# Altium PCB PCB.PcbDoc
Units mil, origin at the board's own origin, x right, y up, seen from the top; angles counter-clockwise.
Board outline 2130 x 1470 mil, 2 copper layers (Top Layer, Bottom Layer); 74 components, 54 nets, 192 pads, 448 vias.
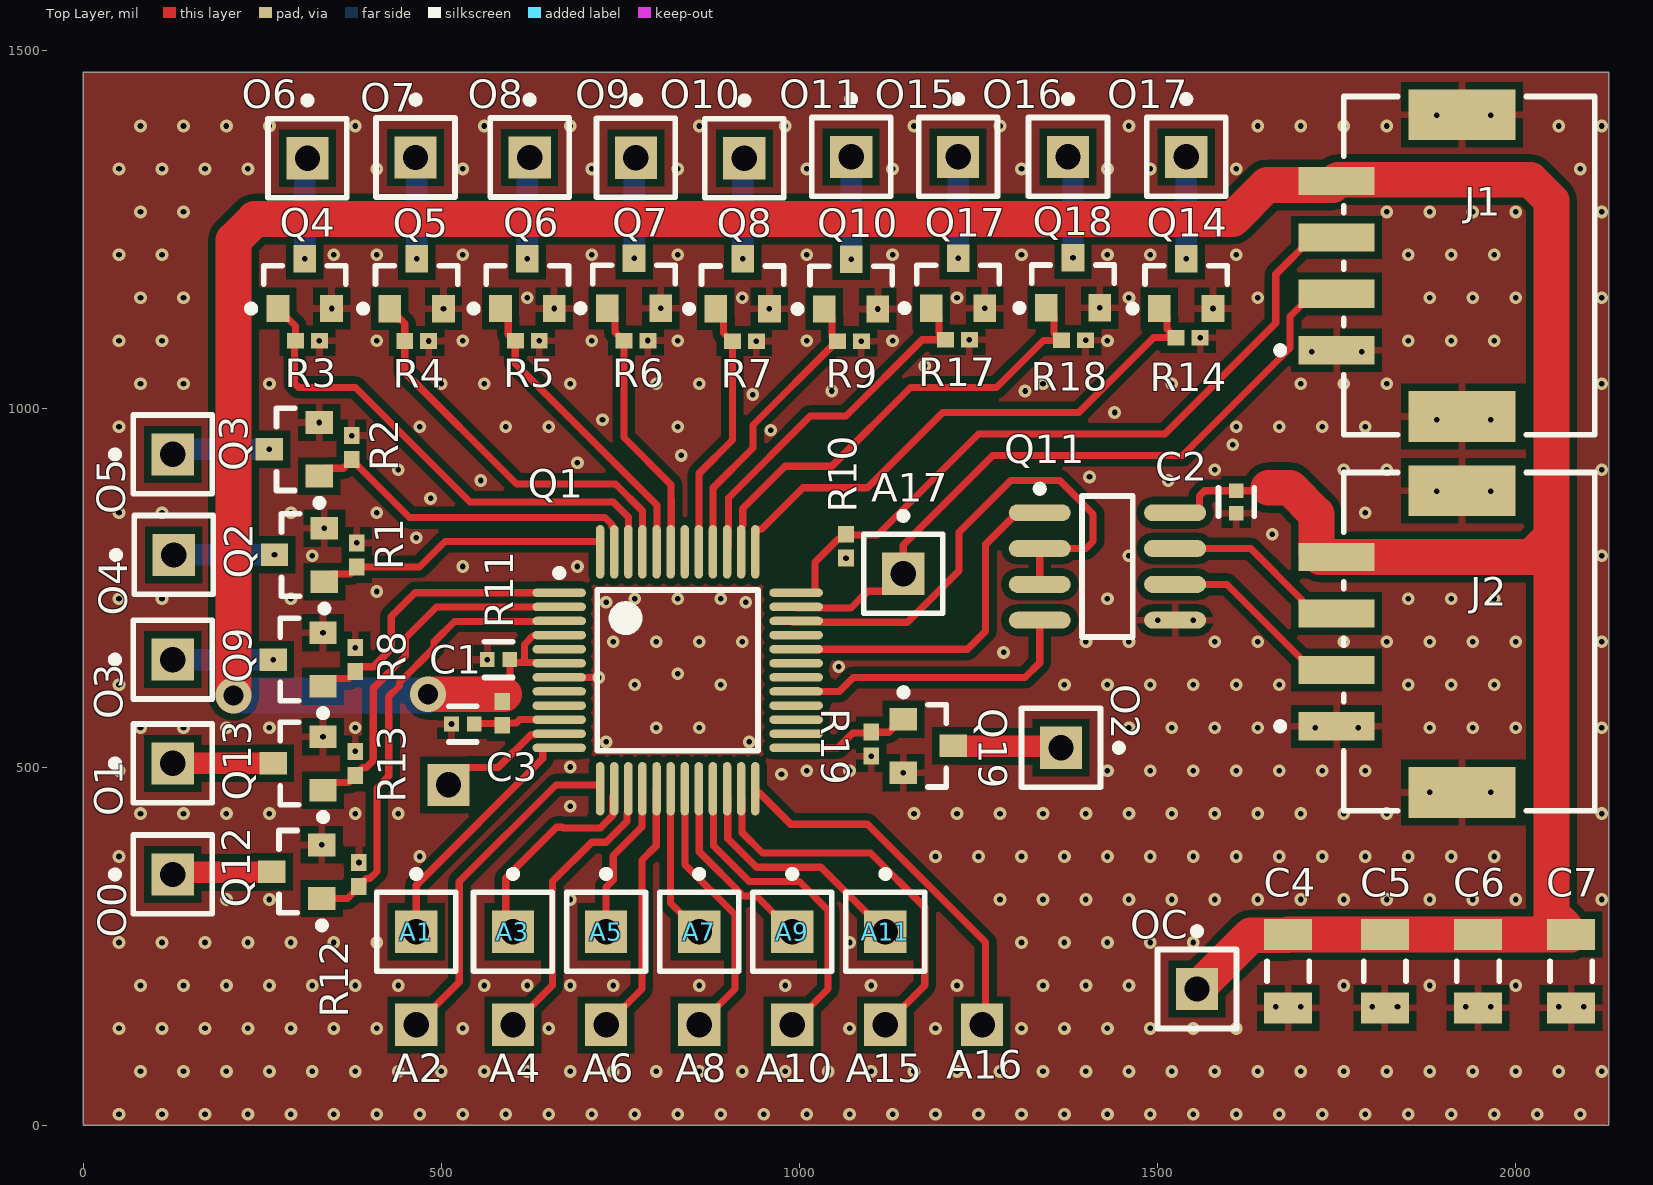
[diagram p0: Top Layer view]
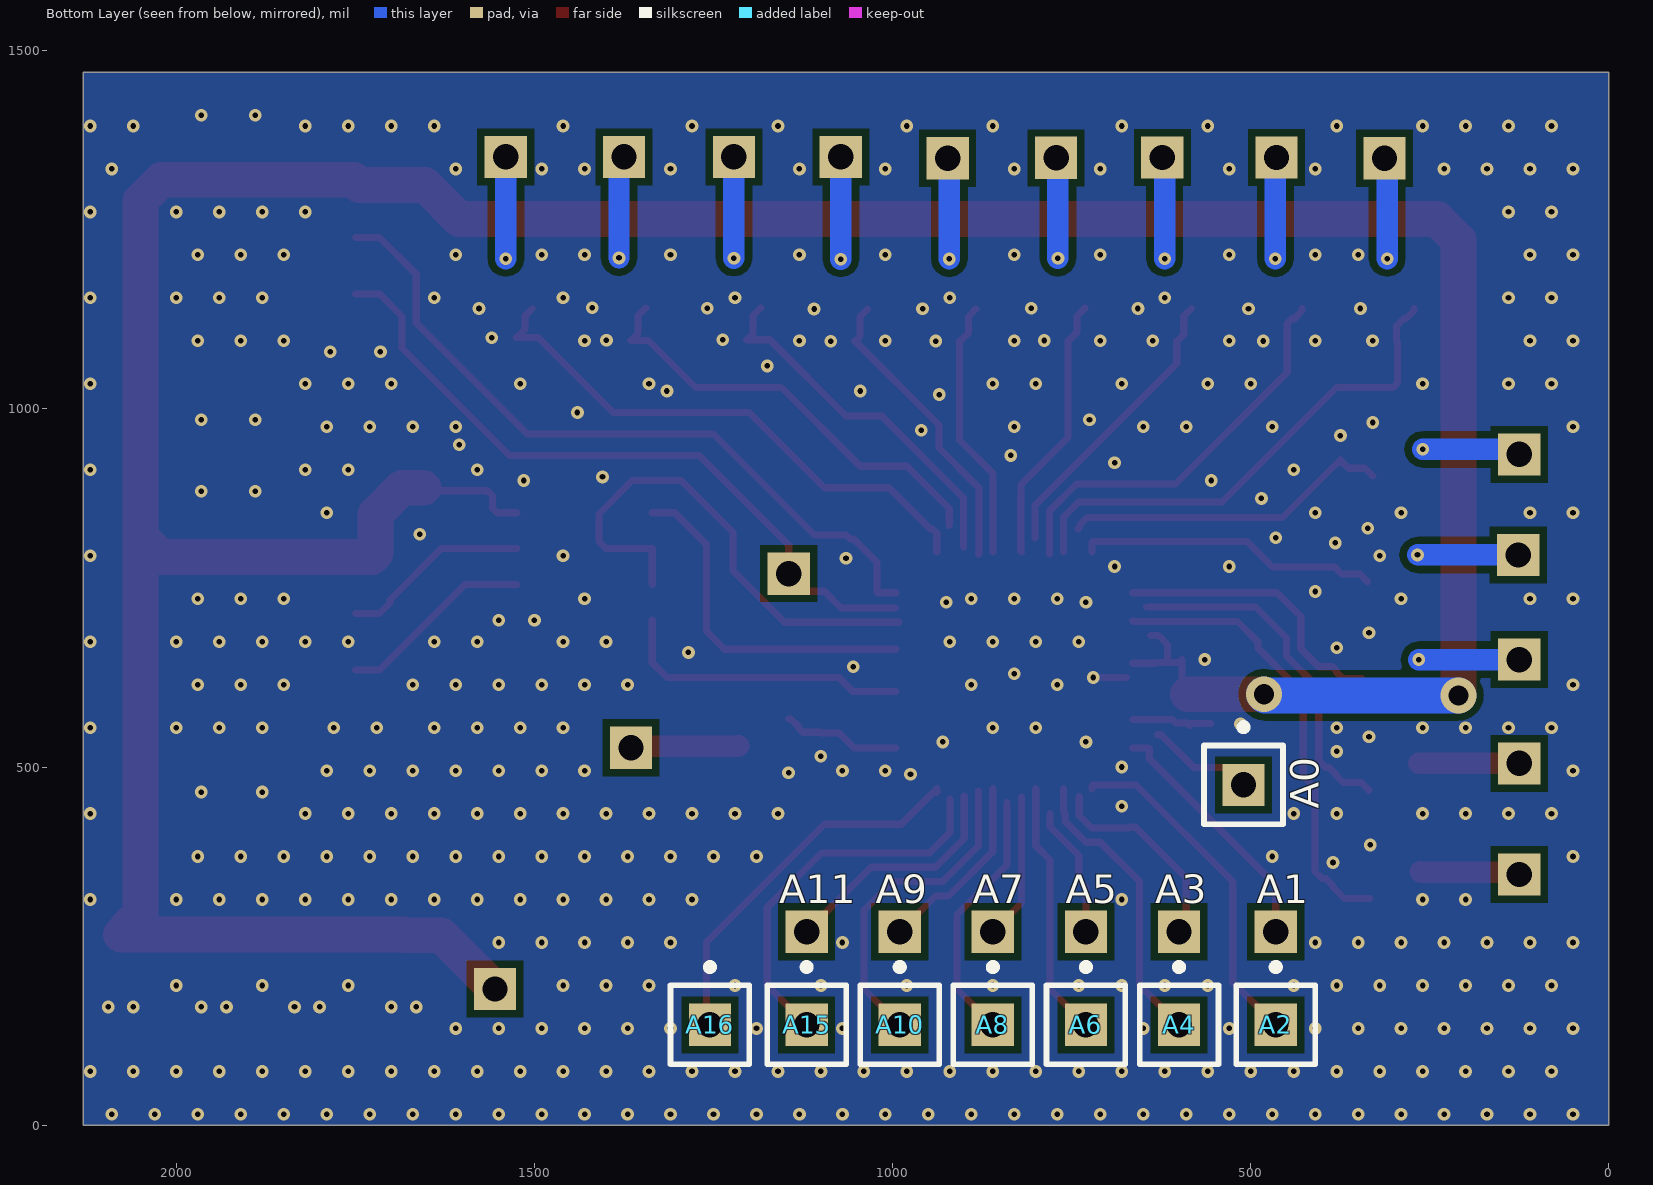
[diagram p1: Bottom Layer view, seen from below]

## Layer stack, top to bottom
Top Solder: solder mask 0.4, Solder Resist, Dk 3.5
Top Layer: signal copper 1.4
Dielectric 1: dielectric 12.6, FR-4, Dk 4.8
Bottom Layer: signal copper 1.4
Bottom Solder: solder mask 0.4, Solder Resist, Dk 3.5

## Board outline
0,0 2130,0 2130,1470 0,1470

## Design rules (kind name [scope] priority, off if disabled: settings)
AssemblyTestPointUsage [All] p1: allowmultiple=TRUE
AssemblyTestpoint [All] p1: testpointundercomponent=TRUE minsize=25 maxsize=100 preferedsize=25 minholesize=0 maxholesize=40 preferedholesize=10 testpointgrid=1 usegrid=TRUE gridtolerance=0.01 allowsidetop=TRUE allowsidebottom=TRUE
Clearance [All] p1: gap=10 ignorepadtopadclearanceinfootprint=FALSE except(0: Arc-Hole Track-Hole SMDPad-Hole THPad-Hole Via-Hole Fill-Hole Poly-Hole Region-Hole Text-Hole; 5.5: Arc-SMDPad Arc-THPad Arc-Via Arc-Text Track-SMDPad Track-THPad Track-Via Track-Text SMDPad-SMDPad SMDPad-THPad SMDPad-Via SMDPad-Text THPad-THPad THPad-Via THPad-Text Via-Via Via-Text Fill-Text Poly-Text Region-Text Text-Text; 9: Arc-Arc Arc-Track Track-Track)
FabricationTestPointUsage [All] p1: valid=0 allowmultiple=TRUE
FabricationTestpoint [All] p1: side=3 testpointundercomponent=TRUE minsize=25 maxsize=100 preferedsize=25 minholesize=7.7 maxholesize=40 preferedholesize=10 testpointgrid=1 allowsidetop=TRUE allowsidebottom=TRUE usegrid=TRUE gridtolerance=0.01
HoleSize [All] p1: absolutevalues=TRUE maxlimit=600 minlimit=7.7 maxpercent=80.000 minpercent=20.000
MinimumSolderMaskSliver [All] p1: minsoldermaskwidth=3.5
PlaneConnect PlaneConnect_via [IsVia] p1: planeconnectstyle=Direct reliefexpansion=20 reliefentries=4 reliefconductorwidth=10 reliefairgap=10
PlaneConnect [All] p2: planeconnectstyle=Relief reliefexpansion=20 reliefentries=4 reliefconductorwidth=10 reliefairgap=10
PolygonConnect PolygonConnect_via [IsVia] p1: connectstyle=Direct reliefconductorwidth=10 reliefentries=4 polygonreliefangle="90 Angle" airgapwidth=10
PolygonConnect [All] p2: connectstyle=Relief reliefconductorwidth=10 reliefentries=4 polygonreliefangle="90 Angle" airgapwidth=10
RoutingVias [All] p1: holewidth=28 width=50 viastyle="Through Hole" minholewidth=28 minwidth=50 maxholewidth=28 maxwidth=50
SilkToSilkClearance [All] p1: silktosilkclearance=1
SilkToSolderMaskClearance [IsPad] p1: minsilkscreentomaskgap=0 clearancetoexposedcopper=FALSE
SolderMaskExpansion SolderMaskExpansion_Via [IsVia] p1: expansion=2 istentingtop=TRUE
SolderMaskExpansion [All] p2: expansion=2 istentingtop=FALSE
UnRoutedNet [All] p1: checkbadconnections=TRUE
Width Width_power [InNet('VCC')] p1: maxlimit=50 minlimit=10 preferedwidth=10
Width [All] p2: maxlimit=30 minlimit=10 preferedwidth=30
20 further rules are at their usual default settings.

## Components (designator, comment, footprint, x,y, rotation, side; value= is the part's Value field where it differs from the comment)
A0 "Socket" PIN1 510,475 r180 bottom
A1 "Socket" PIN1 465,270 r0 top
A2 "Socket" PIN1 465,140 r180 bottom
A3 "Socket" PIN1 600,270 r0 top
A4 "Socket" PIN1 600,140 r180 bottom
A5 "Socket" PIN1 730,270 r0 top
A6 "Socket" PIN1 730,140 r180 bottom
A7 "Socket" PIN1 860,270 r0 top
A8 "Socket" PIN1 860,140 r180 bottom
A9 "Socket" PIN1 990,270 r0 top
A10 "Socket" PIN1 990,140 r180 bottom
A11 "Socket" PIN1 1120,270 r0 top
A15 "Socket" PIN1 1120,140 r180 bottom
A16 "Socket" PIN1 1255,140 r180 bottom
A17 "Socket" PIN1 1145,770 r0 top
C1 "C0402C104K8PACTU 100nF" FP-C0402-BB-MFG 580,650 r180 top value="0.10 μF"
C2 "C0402C104K8PACTU 100nF" FP-C0402-BB-MFG 1610,870 r270 top value="0.10 μF"
C3 "C0402C104K8PACTU 10nF" FP-C0402-BB-MFG 530,560 r180 top value="0.10 μF"
C4 "1206GC102KAT1A 10uF" AVX-1206-2_L 1682.4,214.84 r90 top
C5 "1206GC102KAT1A 10uF" AVX-1206-2_L 1817.4,214.84 r90 top
C6 "1206GC102KAT1A 10uF" AVX-1206-2_L 1947.4,214.84 r90 top
C7 "1206GC102KAT1A 10uF" AVX-1206-2_L 2077.4,214.84 r90 top
J1 "SM04B-PASS-TBT(LF)(SN)" FP-SM04B-PASS-TBT_LF_SN-MFG 1935,1200 r270 top
J2 "SM04B-PASS-TBT(LF)(SN)" FP-SM04B-PASS-TBT_LF_SN-MFG 1935,675 r270 top
O0 "Socket" PIN1 125,350 r90 top
O1 "Socket" PIN1 125,505 r90 top
O2 "Socket" PIN1 1365.16,526.91 r270 top
O3 "Socket" PIN1 125,650 r90 top
O4 "Socket" PIN1 126.42,796.09 r90 top
O5 "Socket" PIN1 125.05,936.42 r90 top
O6 "Socket" PIN1 313.08,1350 r0 top
O7 "Socket" PIN1 463.99,1350.96 r0 top
O8 "Socket" PIN1 623.35,1350.96 r0 top
O9 "Socket" PIN1 771.67,1350.48 r0 top
O10 "Socket" PIN1 923.13,1350 r0 top
O11 "Socket" PIN1 1072.16,1351.8 r0 top
O15 "Socket" PIN1 1221.46,1351.8 r0 top
O16 "Socket" PIN1 1375,1351.8 r0 top
O17 "Socket" PIN1 1540,1351.8 r0 top
OC "Socket" PIN1 1555,190 r0 top
Q1 "STM32G030C8T6" LQFP-48 830,635 r0 top
Q2 "IRLML2502TRPBF" INTR-SOT-23-3_V 301.89,796.09 r90 top
Q3 "IRLML2502TRPBF" INTR-SOT-23-3_V 294.81,943.63 r90 top
Q4 "IRLML2502TRPBF" INTR-SOT-23-3_V 309.33,1175 r0 top
Q5 "IRLML2502TRPBF" INTR-SOT-23-3_V 465.65,1174.79 r0 top
Q6 "IRLML2502TRPBF" INTR-SOT-23-3_V 620,1175 r0 top
Q7 "IRLML2502TRPBF" INTR-SOT-23-3_V 769.08,1175.32 r0 top
Q8 "IRLML2502TRPBF" INTR-SOT-23-3_V 920.73,1174.55 r0 top
Q9 "IRLML2502TRPBF" INTR-SOT-23-3_V 300,650 r90 top
Q10 "IRLML2502TRPBF" INTR-SOT-23-3_V 1072.16,1174.3 r0 top
Q11 "ST1480ABDR" 8S1_N 1430,780 r0 top
Q12 "IRLML2502TRPBF" INTR-SOT-23-3_V 298.37,353.79 r90 top
Q13 "IRLML2502TRPBF" INTR-SOT-23-3_V 300,505 r90 top
Q14 "IRLML2502TRPBF" INTR-SOT-23-3_V 1540,1175 r0 top
Q17 "IRLML2502TRPBF" INTR-SOT-23-3_V 1221.46,1175.57 r0 top
Q18 "IRLML2502TRPBF" INTR-SOT-23-3_V 1381.94,1175.91 r0 top
Q19 "IRLML2502TRPBF" INTR-SOT-23-3_V 1180,529.51 r270 top
R1 "RC0402JR-070RL 4.7k" RESC1005X40X25NL05T10 381.89,796.09 r270 top
R2 "RC0402JR-070RL 4.7k" RESC1005X40X25NL05T10 374.66,946.04 r270 top
R3 "RC0402JR-070RL 4.7k" RESC1005X40X25NL05T10 313.08,1095 r180 top
R4 "RC0402JR-070RL 4.7k" RESC1005X40X25NL05T10 465.65,1094.79 r180 top
R5 "RC0402JR-070RL 4.7k" RESC1005X40X25NL05T10 620,1095 r180 top
R6 "RC0402JR-070RL 4.7k" RESC1005X40X25NL05T10 771.67,1095.48 r180 top
R7 "RC0402JR-070RL 4.7k" RESC1005X40X25NL05T10 923.13,1094.7 r180 top
R8 "RC0402JR-070RL 4.7k" RESC1005X40X25NL05T10 380,650 r270 top
R9 "RC0402JR-070RL 4.7k" RESC1005X40X25NL05T10 1069.76,1094.46 r180 top
R10 "RC0402JR-070RL 1k" RESC1005X40X25NL05T10 1065,808.27 r270 top
R11 "RC0402JR-070RL 100" RESC1005X40X25NL05T10 585,575 r90 top
R12 "RC0402JR-070RL 4.7k" RESC1005X40X25NL05T10 385,350 r270 top
R13 "RC0402JR-070RL 4.7k" RESC1005X40X25NL05T10 380,505 r270 top
R14 "RC0402JR-070RL 4.7k" RESC1005X40X25NL05T10 1542.69,1099.44 r180 top
R17 "RC0402JR-070RL 4.7k" RESC1005X40X25NL05T10 1220.53,1096.43 r180 top
R18 "RC0402JR-070RL 4.7k" RESC1005X40X25NL05T10 1382.75,1095.62 r180 top
R19 "RC0402JR-070RL 4.7k" RESC1005X40X25NL05T10 1100.16,531.91 r90 top

## Footprints (in the part's own frame and the unit in brackets; to place one, negate y for a bottom-side part, rotate by r counter-clockwise, add the part's x,y. Pads: shape width x height; smd on the part's side, far side on the other; paste and mask are expansions set on the pad)
8S1_N [mm] "8-Pin Small Outline Integrated Circuit 1.27 mm Pitch, IPC Medium Density"
  oval 2.2x0.6 smd: 1(-2.4,1.905) 2(-2.4,0.635) 3(-2.4,-0.635) 4(-2.4,-1.905) 5(2.4,-1.905) 6(2.4,-0.635) 7(2.4,0.635) 8(2.4,1.905)
  silkscreen extent -2.52,-2.5 0.9,2.88, body extent -1.95,-2.45 1.95,2.45, height 1.73
AVX-1206-2_L [mm] "SMD, 2-Leads, Body 3.4x1.8mm, IPC High Density"
  rect 1.1x1.7 smd: 1(-1.3,0) 2(1.3,0)
  silkscreen extent -0.35,-0.75 0.35,0.75, body extent -1.7,-0.9 1.7,0.9, height 1.52
FP-C0402-BB-MFG [mm]
  rect 0.52x0.52 smd paste+0 mask+0: 1(-0.4,0) 2(0.4,0)
  silkscreen extent -0.5,-0.64 0.5,0.64, body extent -0.8,-0.4 0.8,0.4, height 0.25
FP-SM04B-PASS-TBT_LF_SN-MFG [mm]
  rect 1x2.7 smd paste+0 mask+0: 1(3,-4.7) 2(1,-4.7) 3(-1,-4.7) 4(-3,-4.7)
  rect 1.8x3.8 smd paste+0 mask+0: 5(-5.35,-0.25) 6(5.35,-0.25)
  silkscreen extent -6,-6.82 6,4.45, body extent -6.01,-5.48 5.99,4.52, height 5.8
INTR-SOT-23-3_V [mm] "SOT23, 3-Leads, Body 2.92x1.3mm, Pitch 1.9mm"
  rect 0.802x0.972 smd: 1(-0.95,-0.885) 2(0.95,-0.885) 3(0,0.885)
  silkscreen extent -2.03,-1.01 1.46,0.64, body extent -1.46,-0.65 1.46,0.65, height 1.12
LQFP-48 [mm] "TSQFP, 48-Leads, Body 9,0x9,0mm (max), Pitch 0,50mm, IPC Medium Density"
  oval 1.9x0.3 smd: 1(-4.2,2.75) 2(-4.2,2.25) 3(-4.2,1.75) 4(-4.2,1.25) 5(-4.2,0.75) 6(-4.2,0.25) 7(-4.2,-0.25) 8(-4.2,-0.75) 9(-4.2,-1.25) 10(-4.2,-1.75) 11(-4.2,-2.25) 12(-4.2,-2.75) 25(4.2,-2.75) 26(4.2,-2.25) 27(4.2,-1.75) 28(4.2,-1.25) 29(4.2,-0.75) 30(4.2,-0.25) 31(4.2,0.25) 32(4.2,0.75) 33(4.2,1.25) 34(4.2,1.75) 35(4.2,2.25) 36(4.2,2.75)
  oval 0.3x1.9 smd: 13(-2.75,-4.2) 14(-2.25,-4.2) 15(-1.75,-4.2) 16(-1.25,-4.2) 17(-0.75,-4.2) 18(-0.25,-4.2) 19(0.25,-4.2) 20(0.75,-4.2) 21(1.25,-4.2) 22(1.75,-4.2) 23(2.25,-4.2) 24(2.75,-4.2) 37(2.75,4.2) 38(2.25,4.2) 39(1.75,4.2) 40(1.25,4.2) 41(0.75,4.2) 42(0.25,4.2) 43(-0.25,4.2) 44(-0.75,4.2) 45(-1.25,4.2) 46(-1.75,4.2) 47(-2.25,4.2) 48(-2.75,4.2)
  silkscreen extent -4.32,-2.85 2.85,3.57, body extent -4.5,-4.5 4.5,4.5, height 1.5
PIN1 [mm] "Connector; Plug"
  rect 1.5x1.5 hole 0.9: 1(0,0)
  silkscreen extent -1.4,-1.4 1.4,2.17
RESC1005X40X25NL05T10 [mm] "Chip Resistor, 2-Leads, Body 1.00x0.50mm, IPC Medium Density"
  rect 0.6x0.55 smd: 1(-0.425,0) 2(0.425,0)
  body extent -0.53,-0.27 0.53,0.28, height 0.4

## Part data
C1 C2 C3: library part CMP-2008-02046-2, "CAP CER 0.1UF 10V X5R 0402", Capacitance="0.10 μF", Manufacturer=Kemet, Manufacturer Part Number=C0402C104K8PACTU, Package=C0402-BB, Temperature="-55°C to +125°C", Temperature Characteristic=X5R, Temperature Coefficient=15%, Temperature Range High=+125°C, Temperature Range Low=-55°C, Tolerance=0.1, Voltage Rating="10 V", Automotive=No, Category=Cap, ComponentLink2Description=Datasheet, ComponentLink2URL=https://content.kemet.com/datasheets/KEM_C1002_X7R_SMD.pdf, Device Class L1="Passive Components", Device Class L2=Capacitors, Device Class L3="Ceramic Capacitors", Digikey Description="CAP CER 0.1UF 10V X5R 0402", Height=0.55mm, Ipc Land Pattern Name=CAPC10050X50, Lead Free=Yes, Material=Ceramic, Mouser Description="Capacitor 100 nF 10 VDC 0402", Octopart=https://octopart.com/c0402c104k8pactu-kemet-140039, RoHS=TRUE
C4 C5 C6 C7: library part CMP-2000-05468-1, "Chip Capacitor, 1 nF, +/- 10%, -55 to 125 degC, 1206 (3216 Metric), RoHS, Tape and Reel", Capacitance=0.001uF, Case Size/Dimension=1206, Dielectric=X7R, Manufacturer=AVX, Package Description="2-Pin SMD, Body 3.4 x 1.8 mm", PartNumber=1206GC102KAT1A, Rated Voltage=2000V, Tolerance=10%, Tolerance (%)=±10%, Datasheet URL=https://datasheet.ciiva.com/11787/0900766b80ed4c37-11787781.pdf, Datasheet Version=11/2010, Manufacturer URL=http://www.avx.com/, Mounting Technology=SurfaceMount, Package Reference=1206, Voltage Rating DC=2000V
J1 J2: library part CMP-2000-07078-2, "CONN HEADER SMD R/A 4POS 2MM", Current Rating=3A, Manufacturer=JST, Temperature="-25°C to +85°C", Temperature Range High=+85°C, Temperature Range Low=-25°C, Voltage Rating=250V, Automotive=No, Category=Conn, ComponentLink2Description=Datasheet, ComponentLink2URL=http://www.jst-mfg.com/product/pdf/eng/ePA-F.pdf, Conn Gender=Male, Conn Orientation="Right Angle", Contact Material=Tin, Device Class L1=Connectors, Device Class L2="Headers and Wire Housings", Device Class L3=unset, Digikey Description="CONN HEADER SMD R/A 4POS 2MM", Height=5.7mm, Lead Free=Yes, Manufacturer Part Number=SM04B-PASS-TBT(LF)(SN), Number Of Contacts=4, Number Of Rows=1, Octopart=https://octopart.com/sm04b-pass-tbt%28lf%29%28sn%29-jst-3990422, Package=SM04B-PASS-TBT(LF)(SN), Pitch=2mm, RoHS=TRUE
Q2 Q3 Q4 Q5 Q6 Q7 Q8 Q9 Q10 Q12 Q13 Q14 Q17 Q18 Q19: library part CMP-2000-04985-1, "N-Channel HEXFET(R) Power MOSFET, 20 V VDS, +/- 12 V VGS, 4.2 A, 3-Pin SOT23, RoHS, Tape and Reel", Drain-Source On Resistance-Max=0.045O, Drain-to-Source Voltage [Vdss]=20V, Manufacturer="International Rectifier", Package Description="3-Pin Small Outline Transistor, Body 2.92 x 1.3 mm, Pitch 0.95 mm", Package Reference=SOT-23-3, Rated Power Dissipation=1.25W, Channel Type=N-Channel, Datasheet URL=https://datasheet.ciiva.com/6383/irlml2502pbf-6383216.pdf, Datasheet Version=Apr-14, Manufacturer URL=http://internationalrectifier.com/, Qg Gate Charge=8nC
R1 R2 R3 R4 R5 R6 R7 R8 R9 R10 R11 R12 R13 R14 R17 R18 R19: library part CMP-1011-00001-2, Manufacturer="Yageo / Phycomp", Part Number=RC0402JR-070RL
A0 A1 A2 A3 A4 A5 A6 A7 A8 A9 A10 A11 A15 A16 A17 O0 O1 O2 O3 O4 O5 O6 O7 O8 O9 O10 O11 O15 O16 O17 OC: LatestRevisionDate=17-Jul-2002, LatestRevisionNote="Re-released for DXP Platform.", Publisher="Altium Limited"

## Via types
v1: diameter 17.7, hole 7.8, Top Layer to Bottom Layer, tented both sides, 446 vias
v2: diameter 50, hole 28, Top Layer to Bottom Layer, tented both sides, 2 vias

## Nets (pads, with @x,y where several pads share a name; then routed paths per layer and width w, separated by ;. In a path a pad name is that pad's centre, name@x,y a point inside that pad or via, vN(x,y) a via of type N, cw(c..) or ccw(c..) an arc to the next point about the centre after c; other vN are vias at no path point)
GND: C1.2 C2.2 C3.2 C4.1 C5.1 C6.1 C7.1 J1.1 J1.5 J1.6 J2.1 J2.5 J2.6 Q1.7 Q2.2 Q3.2 Q4.2 Q5.2 Q6.2 Q7.2 Q8.2 Q9.2 Q10.2 Q11.5 Q12.2 Q13.2 Q14.2 Q17.2 Q18.2 Q19.2 R1.1 R2.1 R3.1 R4.1 R5.1 R6.1 R7.1 R8.1 R9.1 R10.2 R12.1 R13.1 R14.1 R17.1 R18.1 R19.1 | length 50.4
  Top Layer w10: Q1.7@673.28,625.19 673.39,625.08 723.45,625.08 v1@723.56,625.19
  other v1: 50,15 110,15 170,15 230,15 290,15 350,15 410,15 470,15 530,15 590,15 650,15 710,15 770,15 830,15 890,15 950,15 1010,15 1070,15 1130,15 1190,15 1250,15 1310,15 1370,15 1430,15 1490,15 1550,15 1610,15 1670,15 1730,15 1790,15 1850,15 1910,15 1970,15 2030,15 2090,15 80,75 140,75 200,75 260,75 320,75 380,75 440,75 500,75 560,75 620,75 680,75 740,75 800,75 860,75 920,75 980,75 1040,75 1100,75 1160,75 1220,75 1280,75 1340,75 1400,75 1460,75 1520,75 1580,75 1640,75 1700,75 1760,75 1820,75 1880,75 1940,75 2000,75 2060,75 2120,75 50,135 110,135 170,135 230,135 290,135 350,135 410,135 530,135 650,135 1070,135 1190,135 1310,135 1370,135 1430,135 1490,135 1550,135 1610,135 1665,165 1700,165 1800,165 1835,165 1930,165 1965,165 2060,165 2095,165 80,195 140,195 200,195 260,195 320,195 380,195 440,195 560,195 620,195 680,195 740,195 860,195 980,195 1100,195 1220,195 1340,195 1400,195 1460,195 1760,195 1880,195 2000,195 50,255 110,255 170,255 230,255 290,255 350,255 410,255 1070,255 1310,255 1370,255 1430,255 1490,255 1550,255 200,315 260,315 680,315 1280,315 1340,315 1400,315 1460,315 1520,315 1580,315 1640,315 1700,315 1760,315 1820,315 1880,315 1940,315 2000,315 2120,315 385,366.73 50,375 470,375 1190,375 1250,375 1310,375 1370,375 1430,375 1490,375 1550,375 1610,375 1670,375 1730,375 1790,375 1850,375 1910,375 1970,375 333.21,391.19 80,435 140,435 200,435 260,435 380,435 440,435 1160,435 1220,435 1280,435 1340,435 1400,435 1460,435 1520,435 1580,435 1640,435 1700,435 1760,435 1820,435 2120,435 680,445 1880,465 1965,465 975,490 1145.16,492.11 50,495 1010,495 1070,495 1430,495 1490,495 1550,495 1610,495 1670,495 1730,495 1790,495 680,500 1100.16,515.18 380,521.73 730,535 930,535 334.84,542.4 80,555 140,555 200,555 260,555 380,555 800,555 860,555 1460,555 1520,555 1580,555 1640,555 1720,555 1780,555 1880,555 1940,555 2000,555 2120,555 514.25,560 50,615 770,615 890,615 1370,615 1430,615 1490,615 1550,615 1610,615 1670,615 1850,615 1910,615 1970,615 720,625 830,630 1055,640 564.25,650 1285,660 380,666.73 740,675 800,675 860,675 920,675 1400,675 1460,675 1580,675 1640,675 1760,675 1820,675 1880,675 1940,675 2000,675 2120,675 334.84,687.4 1500,705 1550,705 730,730 925,730 50,735 110,735 290,735 770,735 830,735 890,735 1430,735 1850,735 1910,735 1970,735 410,745 530,780 690,780 1065,791.54 320,795 1460,795 2120,795 381.89,812.82 465,820 1660,825 336.73,833.49 50,855 110,855 290,855 410,855 1790,855 485,875 1890,885 1965,885 555,900 1515,900 1405,905 440,915 1580,915 1760,915 1820,915 2120,915 690,925 835,935 1605,950 374.66,962.77 960,970 50,975 470,975 590,975 650,975 830,975 1610,975 1670,975 1730,975 1790,975 329.66,981.04 725,985 1890,985 1965,985 1440,995 935,1020 1045,1025 1315,1025 80,1035 140,1035 260,1035 500,1035 560,1035 680,1035 800,1035 860,1035 1340,1035 1520,1035 1700,1035 1760,1035 1820,1035 2120,1035 1175,1060 1715,1080 1785,1080 1086.5,1094.46 50,1095 110,1095 329.81,1095 410,1095 482.38,1094.79 530,1095 636.73,1095 710,1095 788.41,1095.48 830,1095 939.86,1094.7 1010,1095 1130,1095 1430,1095 1850,1095 1910,1095 1970,1095 1237.26,1096.43 1399.49,1095.62 1559.42,1099.44 1109.57,1139.46 346.73,1140.16 503.05,1139.95 657.4,1140.16 806.48,1140.48 958.13,1139.7 1577.4,1140.16 1258.86,1140.72 1419.34,1141.07 80,1155 140,1155 620,1155 920,1155 1220,1155 1460,1155 1640,1155 1880,1155 1940,1155 2000,1155 2120,1155 50,1215 110,1215 350,1215 410,1215 530,1215 710,1215 830,1215 1010,1215 1130,1215 1310,1215 1430,1215 1490,1215 1610,1215 1850,1215 1910,1215 1970,1215 80,1275 140,1275 1820,1275 1880,1275 1940,1275 2000,1275 2120,1275 50,1335 110,1335 170,1335 230,1335 410,1335 530,1335 710,1335 830,1335 1010,1335 1130,1335 1310,1335 1430,1335 1490,1335 1610,1335 2090,1335 80,1395 140,1395 200,1395 260,1395 380,1395 560,1395 680,1395 860,1395 980,1395 1160,1395 1280,1395 1460,1395 1640,1395 1700,1395 1760,1395 1820,1395 2060,1395 2120,1395 1890,1410 1965,1410
NetA0_1: A0.1 Q1.11 | length 149
  Top Layer w10: A0.1 534.53,499.53 579.53,499.53 625,545 Q1.11@630,545
NetA1_1: A1.1 Q1.12 | length 352.4
  Top Layer w10: A1.1 465,335 641.68,511.68 641.68,525.9 642.52,526.73 Q1.12
NetA2_1: A2.1 Q1.13 | length 482.4
  Top Layer w10: A2.1 525,200 525,340 660,475 720.9,475 721.73,474.16 Q1.13
NetA3_1: A3.1 Q1.14 | length 291.8
  Top Layer w10: A3.1 590,280 590,345 660.86,415.86 669.14,415.86 670,415 721.78,415 739.25,432.47 Q1.14@739.25,458.88
NetA4_1: A4.1 Q1.15 | length 408.1
  Top Layer w10: A4.1 655,195 655,340 710,395 730.07,395 759.25,424.19 759.25,435.81 761.1,437.66 Q1.15
NetA5_1: A5.1 Q1.16 | length 185.7
  Top Layer w10: A5.1 730,332.26 740,342.26 740,376.65 780,416.65 Q1.16@780,435
NetA6_1: A6.1 Q1.17 | length 358.8
  Top Layer w10: A6.1 780,190 780,370 800,390 800,469.17 Q1.17
NetA7_1: A7.1 Q1.18 | length 204.9
  Top Layer w10: Q1.18@820,458.28 820,310 A7.1
NetA8_1: A8.1 Q1.19 | length 359.7
  Top Layer w10: Q1.19@840,450 840,363.9 910,293.9 910,190 A8.1
NetA9_1: A9.1 Q1.20 | length 264.4
  Top Layer w10: Q1.20 860,469.17 860,381.72 921.72,320 940,320 A9.1
NetA10_1: A10.1 Q1.21 | length 454.5
  Top Layer w10: Q1.21@880,466.47 880,390 930,340 1000,340 1040,300 1040,190 A10.1
NetA11_1: A11.1 Q1.22 | length 333.3
  Top Layer w10: Q1.22@900,459.45 900,400 940,360 1030,360 A11.1
NetA15_1: A15.1 Q1.23 | length 531.8
  Top Layer w10: Q1.23@920,455 920,408.28 948.28,380 1099.14,380 1175,304.14 1175,195 A15.1
NetA16_1: A16.1 Q1.24 | length 528.4
  Top Layer w10: Q1.24 938.27,465.02 939.1,464.18 943.73,464.18 987.91,420 1095,420 1260,255 A16.1@1260,140
NetC3_1: C3.1 Q1.10 R11.1 | length 116.9
  Top Layer w10: C3.1@555.2,560.85 R11.1@589.17,560.85 ; R11.1 588.32,561.58 604.51,561.58 609.03,566.1 Q1.10
NetJ2_2: J2.2 Q11.6 | length 274.9
  Top Layer w10: Q11.6 1597.13,755 1716.5,635.63 J2.2
NetJ2_3: J2.3 Q11.7 | length 265.4
  Top Layer w10: Q11.7 1630,805 1701.81,733.19 1701.81,729.06 1716.5,714.37 J2.3
NetO0_1: O0.1 Q12.3 | length 140.1
  Top Layer w30: O0.1 128,353 262.74,353 Q12.3
NetO1_1: O1.1 Q13.3 | length 140.2
  Top Layer w30: O1.1 Q13.3
NetO2_1: O2.1 Q19.3 | length 151.4
  Top Layer w30: Q19.3 1215.63,528.72 1363.35,528.72 O2.1
NetO3_1: O3.1 Q9.3 | length 140.2
  Bottom Layer w30: O3.1 v1(265.16,650)
NetO4_1: O4.1 Q2.3 | length 140.6
  Bottom Layer w30: O4.1 v1(267.05,796.09)
NetO5_1: O5.1 Q3.3 | length 137.9
  Bottom Layer w30: O5.1 132.27,943.63 v1(259.97,943.63)
NetO6_1: O6.1 Q4.3 | length 141.7
  Bottom Layer w30: v1(309.33,1209.84) 309.33,1346.25 O6.1
NetO7_1: O7.1 Q5.3 | length 142
  Bottom Layer w30: O7.1 465.65,1349.31 v1(465.65,1209.63)
NetO8_1: O8.1 Q6.3 | length 142.5
  Bottom Layer w30: v1(620,1209.84) 620,1347.61 O8.1
NetO9_1: O9.1 Q7.3 | length 141.4
  Bottom Layer w30: v1(769.08,1210.17) 769.08,1347.88 O9.1
NetO10_1: O10.1 Q8.3 | length 141.6
  Bottom Layer w30: v1(920.73,1209.39) 920.73,1347.6 O10.1
NetO11_1: O11.1 Q10.3 | length 142.7
  Bottom Layer w30: v1(1072.16,1209.14) O11.1
NetO15_1: O15.1 Q17.3 | length 141.4
  Bottom Layer w30: v1(1221.46,1210.41) O15.1
NetO16_1: O16.1 Q18.3 | length 143.9
  Bottom Layer w30: O16.1 1381.94,1344.86 v1(1381.94,1210.75)
NetO17_1: O17.1 Q14.3 | length 142
  Bottom Layer w30: v1(1540,1209.84) O17.1
NetQ1_1: Q1.1 Q9.1 R8.2 | length 411.4
  Top Layer w10: Q9.1 345.63,623.39 371.1,623.39 380,632.28 R8.2 380,634.25 385.83,640.08 405.08,640.08 430,665 430,710 463.27,743.27 Q1.1
NetQ1_2: Q1.2 Q13.1 R13.2 | length 490.9
  Top Layer w10: Q13.1 345.63,478.39 371.1,478.39 380,487.28 R13.2 380,489.25 390.17,499.42 395.18,499.42 405,509.25 405,609.85 450,654.85 450,680 493.27,723.27 Q1.2@645,723.27
NetQ1_3: Q1.3 Q12.1 R12.2 | length 634.1
  Top Layer w10: Q12.1 369.1,316.38 385,332.28 R12.2 385,334.25 395.17,344.42 400.18,344.42 410,354.25 410,470.86 426.64,487.5 426.64,598.36 441.58,613.3 441.58,618.15 490,666.57 490,675 518.27,703.27 664.02,703.27 Q1.3
NetQ1_25: Q1.25 Q19.1 R19.2 | length 167.4
  Top Layer w10: Q1.25 1053.46,526.73 1074.33,547.6 1099.12,547.6 R19.2 1125.17,548.64 1131.02,554.5 1131.02,556.12 1141.81,566.91 Q19.1
NetQ1_29: Q1.29 Q11.4 | length 416.2
  Top Layer w10: Q1.29 1055.47,605.47 1075,625 1315,625 1335.51,645.51 Q11.4
NetQ1_32: Q1.32 Q11.1 | length 489.9
  Top Layer w10: Q1.32 1234.53,664.53 1260,690 1260,810.98 1304.02,855 Q11.1
NetQ1_34: Q1.34 Q11.2 Q11.3 | length 718.5
  Top Layer w10: Q1.34@991.34,702.08 1150.99,702.08 1222.88,773.98 1222.88,827.88 1295,900 1363.34,900 1410,853.34 1410,815 1400,805 Q11.2 Q11.3
NetQ1_40: Q1.40 Q10.1 R9.2 | length 422.3
  Top Layer w10: Q1.40@880.13,797.03 879.53,797.62 879.53,890 935,945.47 935,977.41 R9.2@1052.05,1094.46 ; Q10.1 1045.55,1128.67 1045.55,1100.95 R9.2@1052.05,1094.46 ; R9.2 R9.2@1052.05,1094.46
NetQ1_41: Q1.41 Q8.1 R7.2 | length 368.9
  Top Layer w10: Q1.41 859.53,909.53 906.39,956.4 R7.2 905.41,1094.7 894.11,1106 894.11,1128.92 Q8.1
NetQ1_43: Q1.43 Q7.1 R6.2 | length 378.1
  Top Layer w10: Q7.1 742.46,1129.69 742.46,1106.98 753.96,1095.48 R6.2 754.94,960.06 820.86,894.14 820.86,873.99 821.1,873.75 821.1,818 820.99,817.89 820.99,801.19 Q1.43
NetQ1_44: Q1.44 Q6.1 R5.2 | length 411.2
  Top Layer w10: Q6.1 593.39,1129.37 593.39,1103.9 602.28,1095 R5.2 603.27,1063.3 801.1,865.47 Q1.44@801.1,820
NetQ1_45: Q1.45 Q5.1 R4.2 | length 571.3
  Top Layer w10: Q5.1 428.25,1136.6 439.03,1125.82 442.38,1125.82 448.92,1119.28 R4.2 448.92,1051.08 605,895 743.28,895 781.1,857.18 781.1,797.85 Q1.45@781.04,797.78
NetQ1_46: Q1.46 Q4.1 R3.2 | length 709
  Top Layer w10: Q4.1 271.93,1136.81 282.71,1126.02 286.06,1126.02 296.34,1115.74 R3.2 295,1093.66 295,1035.86 300.86,1030 380,1030 540,870 740,870 761.1,848.9 Q1.46
NetQ1_47: Q1.47 Q3.1 R2.2 | length 463.4
  Top Layer w10: Q3.1 340.44,917.02 363.36,917.02 R2.2@374.66,928.32 ; R2.2 R2.2@374.66,928.32 ; Q1.47@740.81,832.34 741.07,832.6 741.07,832.69 738.14,835.62 738.14,838.65 728.53,848.26 455.7,848.26 381.47,922.49 380.48,922.49 R2.2@374.66,928.32
NetQ1_48: Q1.48 Q2.1 R1.2 | length 423.1
  Top Layer w10: Q2.1 347.52,769.48 372.99,769.48 381.89,778.37 R1.2 469.36,779.36 505,815 720.9,815 721.73,814.16 Q1.48
O15IN: Q1.39 Q17.1 R17.2 | length 515.7
  Top Layer w10: Q1.39@900.77,806.56 900.77,875.77 1015,990 1065,990 1171.43,1096.43 R17.2@1202.81,1096.43 ; Q17.1 1194.85,1129.94 1194.85,1104.4 R17.2@1202.81,1096.43 ; R17.2 R17.2@1202.81,1096.43
O16IN: Q1.38 Q18.1 R18.2 | length 620.2
  Top Layer w10: Q1.38@920.77,837.06 920.77,860.77 980,920 1045,920 1155,1030 1275,1030 1340.61,1095.62 R18.2@1365.04,1095.62 ; Q18.1 1355.32,1130.28 1355.32,1105.33 R18.2@1365.04,1095.62 ; R18.2 R18.2@1365.04,1095.62
O17IN: Q1.37 Q14.1 R14.2 | length 776.7
  Top Layer w10: Q1.37 938.27,826.28 944.33,832.34 947.34,832.34 1005,890 1095,890 1200,995 1390,995 1494.44,1099.44 R14.2@1524.97,1099.44 ; Q14.1 1513.39,1129.37 1513.39,1111.03 R14.2@1524.97,1099.44 ; R14.2 R14.2@1524.97,1099.44
SWCLK: J1.3 Q1.36 R10.1 | length 1024.3
  Top Layer w10: Q1.36 1021.01,743.27 1021.85,744.1 1021.85,785.87 1054.17,818.19 1059.17,818.19 1065,824.02 1109.02,824.02 1250,965 1510,965 1665,1120 1665,1187.87 1716.5,1239.37 J1.3
SWDIO: A17.1 J1.2 Q1.35 | length 984.7
  Top Layer w10: Q1.35@996.19,722.08 1072.08,722.08 1095.47,745.47 1120.47,745.47 A17.1 1145,810 1270,935 1535,935 1685,1085 1685,1129.13 1716.5,1160.63 J1.2
VCC: C1.1 C2.1 C4.2 C5.2 C6.2 C7.2 J1.4 J2.4 OC.1 Q1.4 Q1.6 Q11.8 R11.2 | length 5289.5
  Top Layer w10: 595.75,609.39 595.75,645.81 C1.1 599.94,645.81 616.02,645.81 ; Q1.4@639.82,683.48 628.48,683.48 616.02,671.02 616.02,645.81 ; Q1.6 632.66,644.84 631.69,645.81 616.02,645.81 ; Q11.8 1552.3,855 1558.59,861.29 1558.59,878.59 1565.75,885.75 C2.1 1650.75,885.75 1655,890
  Top Layer w50: v2(210,600) 210,1235.71 239.29,1265 1605,1265 1652.8,1312.8 1744.65,1312.8 J1.4 1751.85,1320 2020.71,1320 2050,1290.71 2050,822.4 ; v2(481.58,601.58) R11.2@587.94,601.58 ; OC.1 1630.1,265.1 1681.47,265.1 C4.2 C5.2 C6.2 C7.2@2072.28,266.02 ; 1655,890 1685,890 1721.81,853.19 1721.81,798.43 1727.13,793.11 J2.4 2020.71,793.11 2050,822.4 ; C7.2 C7.2@2072.28,266.02 ; 2050,822.4 2050,295.31 2068.94,276.38 2068.94,269.37 C7.2@2072.28,266.02
  Bottom Layer w50: v2(210,600) 480,600 v2(481.58,601.58)
pads on no net: Q1.5 Q1.8 Q1.9 Q1.26 Q1.27 Q1.28 Q1.30 Q1.31 Q1.33 Q1.42

## Polygon pours and split planes (outlines as drawn)
GND on Bottom Layer "GND_L02_P001" (solid, remove dead copper, pour order 1): 0,0 0,1470 2130,1470 2130,0
GND on Top Layer "GND_L01_P000" (solid, remove dead copper, pour order 0): 0,0 0,1470 2130,1470 2130,0

## Silkscreen, mask and mechanical layers (free items; w line width, h text height)
Mechanical 1:
  lines w5.91: -2.95,0 ccw(c0,0) 0,-2.95 ; -2.95,0 ccw(c0,0) 0,-2.95 ; -2.95,0 -2.95,1470 ; -2.95,1470 cw(c0,1470) 0,1472.95 ; -2.95,1470 cw(c0,1470) 0,1472.95 ; 0,-2.95 2130,-2.95 ; 0,1472.95 2130,1472.95 ; 2130,-2.95 ccw(c2130,0) 2132.95,0 ; 2130,-2.95 ccw(c2130,0) 2132.95,0 ; 2130,1472.95 cw(c2130,1470) 2132.95,1470 ; 2130,1472.95 cw(c2130,1470) 2132.95,1470 ; 2132.95,0 2132.95,1470